# EAGLE board wheatstone_bridge_board (EAGLE 9.6.2)
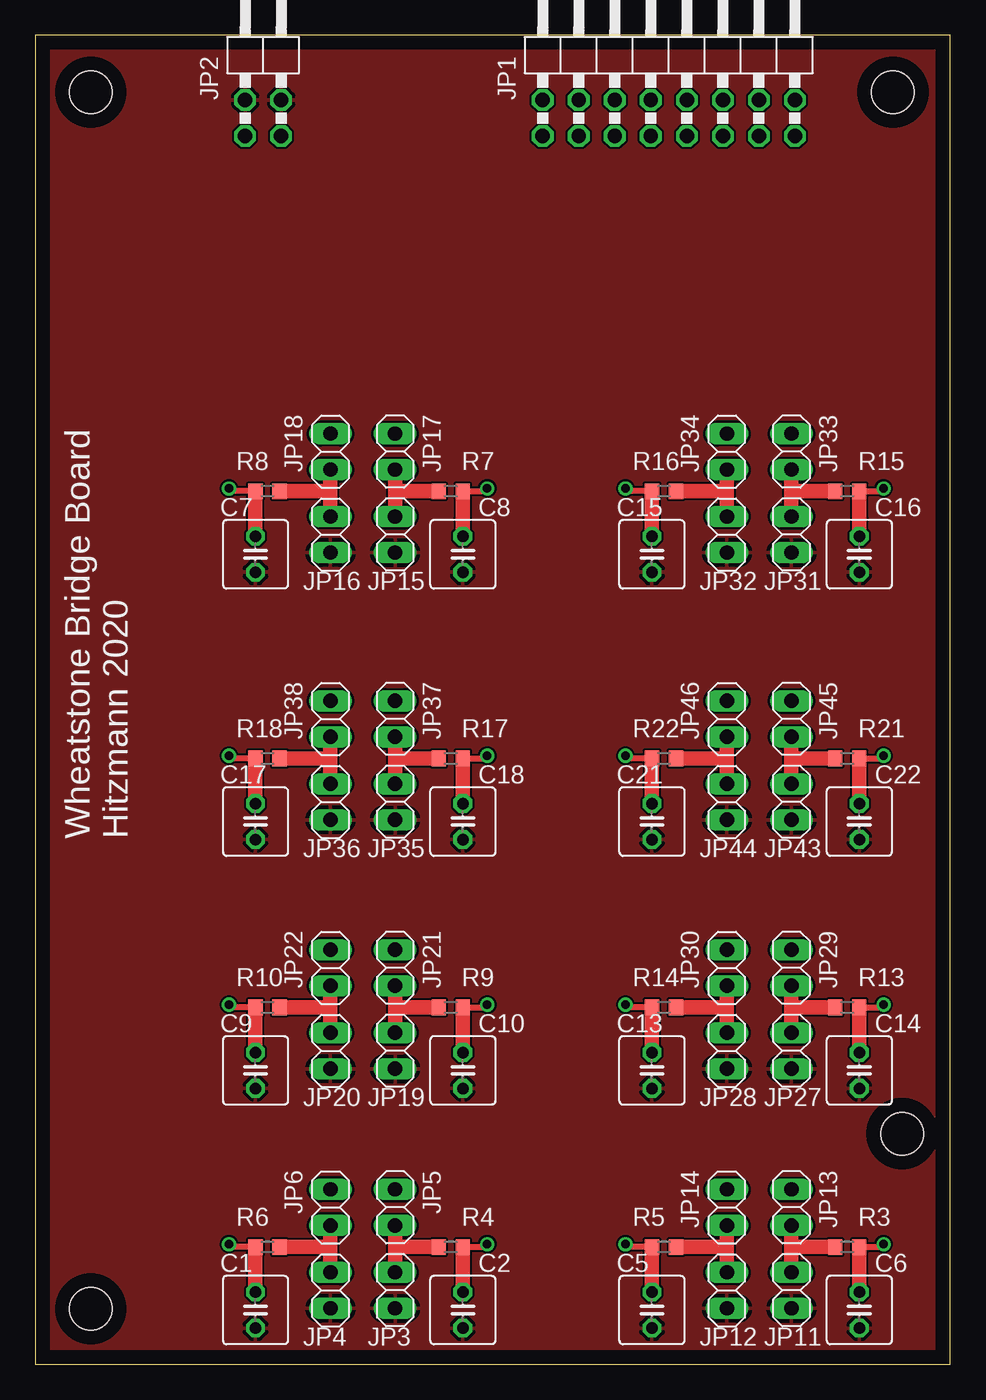
[diagram p0: board, top side]
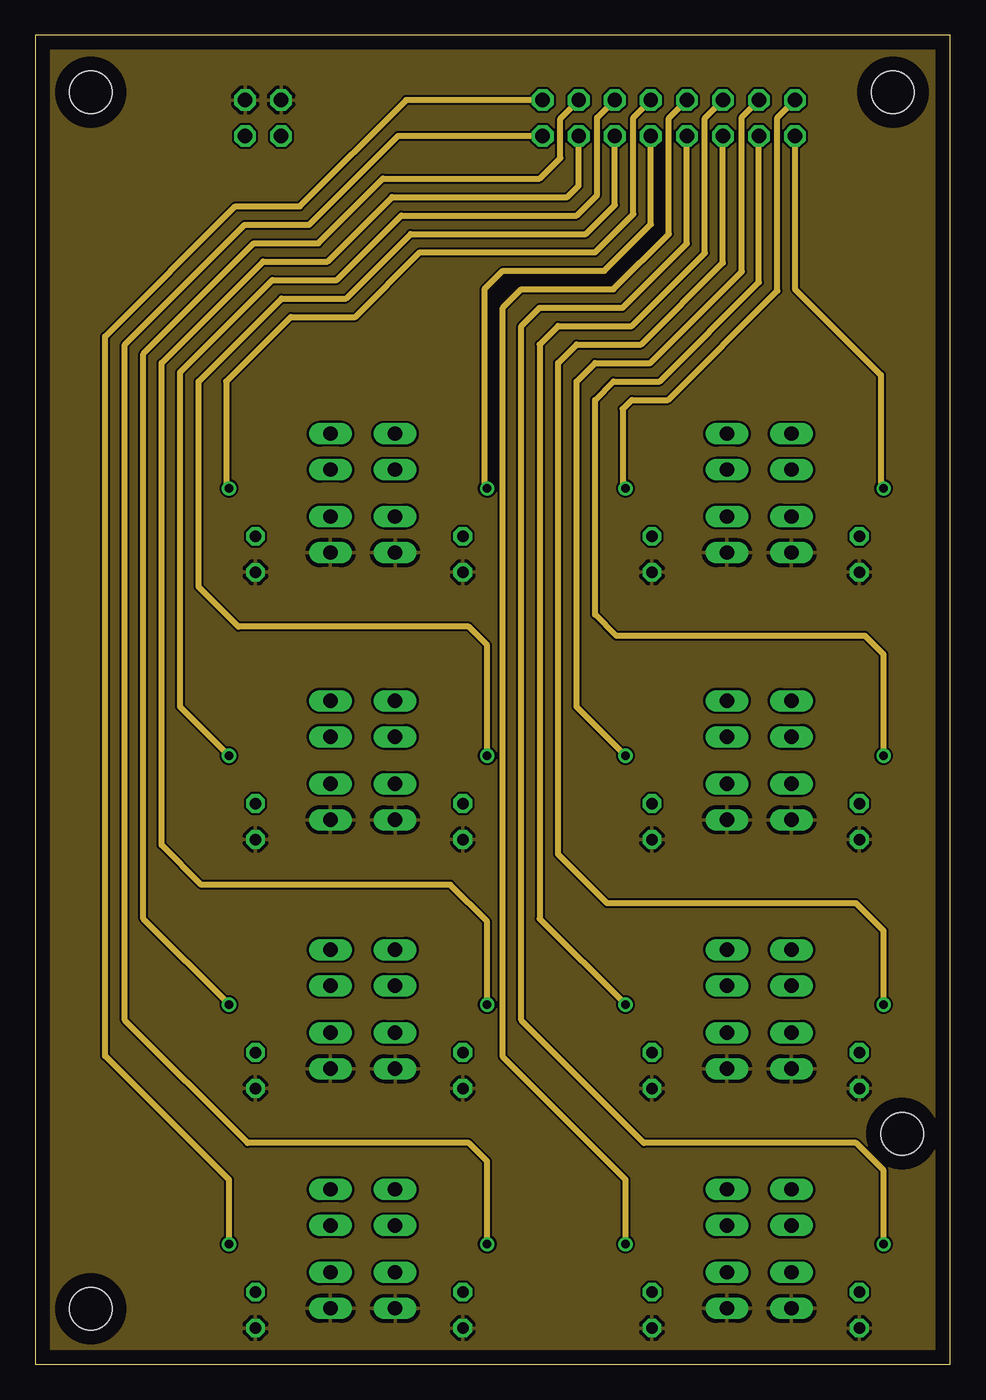
[diagram p1: board, inner layer Route2]
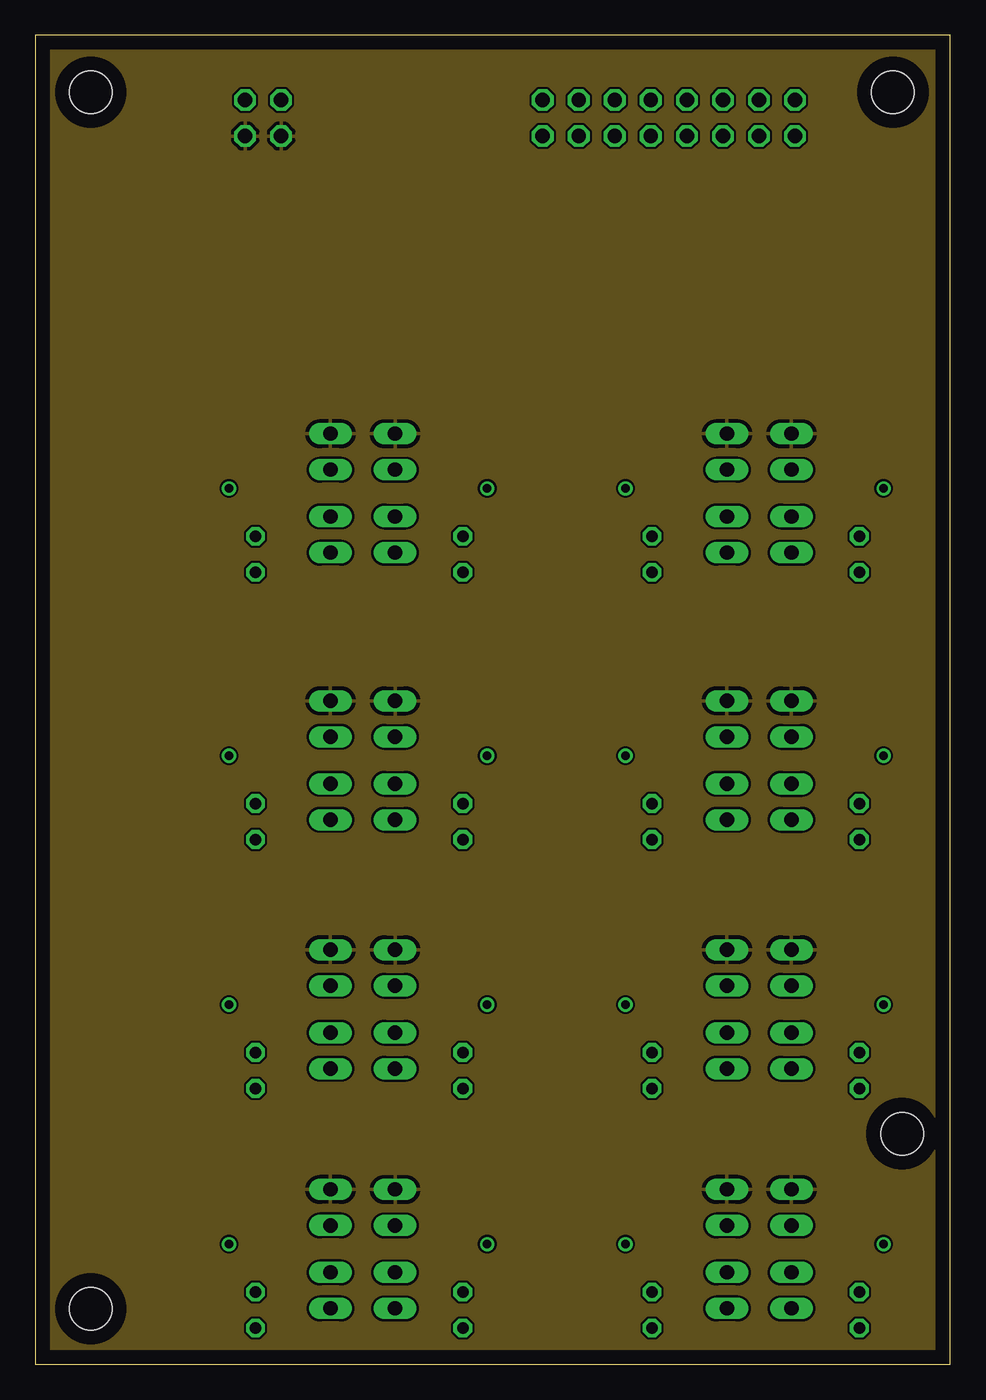
[diagram p2: board, inner layer Route15]
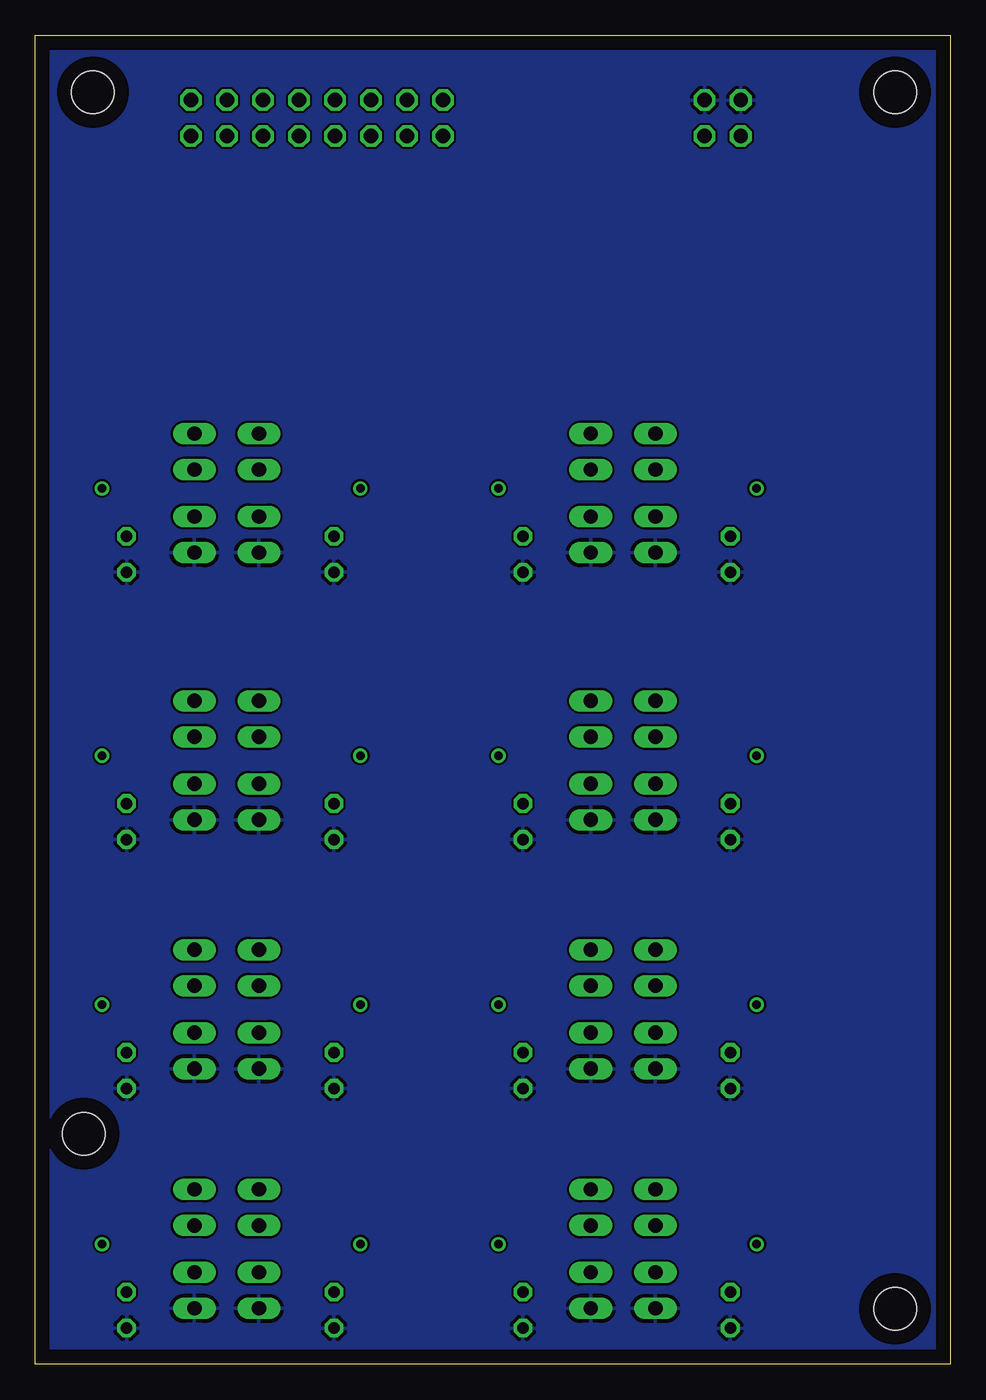
[diagram p3: board, bottom side, seen from below]

Size 64.5 x 93.7 mm. Coordinates in mm from the lower left corner, seen from the top.
Outline: 0,0 64.5,0 64.5,93.7 0,93.7 0,0
Copper layers (1+2*15+16): Top 0.035mm / dielectric 1.5mm / Route2 0.035mm / dielectric 0.15mm / Route15 0.035mm / dielectric 0.2mm / Bottom 0.035mm
Design rules "default *": minimum track width 6mil, minimum drill 0.35mm, track to track 6mil, track to pad 6mil, pad to pad 6mil, via to via 6mil, smd to smd 6mil, copper to edge 40mil, drill to drill 6mil, minimum pad ring 10mil, minimum via ring 8mil, stop-mask expansion 4mil, vias tented up to drill 0mil, thermal gap 10mil
Holes 3 mm at 3.9,89.7 60.45,89.7 61.1,16.25 3.9,3.9

## Footprints (pad centres in the part's own frame; a part is rotated, then mirrored left to right if it is on the bottom)
C025-050X050 = drill 0.813 octagon: 1 -1.27,0; 2 1.27,0
2X08/90 = drill 1.016 octagon: 1 -8.89,-6.35; 2 -8.89,-3.81; 3 -6.35,-6.35; 4 -6.35,-3.81; 5 -3.81,-6.35; 6 -3.81,-3.81; 7 -1.27,-6.35; 8 -1.27,-3.81; 9 1.27,-6.35; 10 1.27,-3.81; 11 3.81,-6.35; 12 3.81,-3.81; 13 6.35,-6.35; 14 6.35,-3.81; 15 8.89,-6.35; 16 8.89,-3.81
2X02/90 = drill 1.016 octagon: 1 -1.27,-6.35; 2 -1.27,-3.81; 3 1.27,-6.35; 4 1.27,-3.81
1X02 = drill 1.016 long: 1 -1.27,0; 2 1.27,0
R0603 = smd 1 x 1.1: 1 -0.85,0; 2 0.85,0

## Placement (x,y rotation side)
C1  [C025-050X050]  15.51,3.81 270 top
C2  [C025-050X050]  30.13,3.81 270 top
C5  [C025-050X050]  43.46,3.81 270 top
C6  [C025-050X050]  58.08,3.81 270 top
C7  [C025-050X050]  15.51,57.11 270 top
C8  [C025-050X050]  30.13,57.11 270 top
C9  [C025-050X050]  15.51,20.71 270 top
C10  [C025-050X050]  30.13,20.71 270 top
C13  [C025-050X050]  43.46,20.71 270 top
C14  [C025-050X050]  58.08,20.71 270 top
C15  [C025-050X050]  43.46,57.11 270 top
C16  [C025-050X050]  58.08,57.11 270 top
C17  [C025-050X050]  15.51,38.26 270 top
C18  [C025-050X050]  30.13,38.26 270 top
C21  [C025-050X050]  43.46,38.26 270 top
C22  [C025-050X050]  58.08,38.26 270 top
JP1  [2X08/90]  44.65,92.95 0 top
JP2  [2X02/90]  16.05,92.95 0 top
JP3  [1X02]  25.35,5.2 270 top
JP4  [1X02]  20.8,5.2 90 top
JP5  [1X02]  25.35,11.05 270 top
JP6  [1X02]  20.8,11.05 90 top
JP11  [1X02]  53.3,5.2 270 top
JP12  [1X02]  48.75,5.2 90 top
JP13  [1X02]  53.3,11.05 270 top
JP14  [1X02]  48.75,11.05 90 top
JP15  [1X02]  25.35,58.5 270 top
JP16  [1X02]  20.8,58.5 90 top
JP17  [1X02]  25.35,64.35 270 top
JP18  [1X02]  20.8,64.35 90 top
JP19  [1X02]  25.35,22.1 270 top
JP20  [1X02]  20.8,22.1 90 top
JP21  [1X02]  25.35,27.95 270 top
JP22  [1X02]  20.8,27.95 90 top
JP27  [1X02]  53.3,22.1 270 top
JP28  [1X02]  48.75,22.1 90 top
JP29  [1X02]  53.3,27.95 270 top
JP30  [1X02]  48.75,27.95 90 top
JP31  [1X02]  53.3,58.5 270 top
JP32  [1X02]  48.75,58.5 90 top
JP33  [1X02]  53.3,64.35 270 top
JP34  [1X02]  48.75,64.35 90 top
JP35  [1X02]  25.35,39.65 270 top
JP36  [1X02]  20.8,39.65 90 top
JP37  [1X02]  25.35,45.5 270 top
JP38  [1X02]  20.8,45.5 90 top
JP43  [1X02]  53.3,39.65 270 top
JP44  [1X02]  48.75,39.65 90 top
JP45  [1X02]  53.3,45.5 270 top
JP46  [1X02]  48.75,45.5 90 top
R3  [R0603]  57.23,8.26 0 top
R4  [R0603]  29.28,8.26 0 top
R5  [R0603]  44.31,8.26 180 top
R6  [R0603]  16.36,8.26 180 top
R7  [R0603]  29.28,61.55 0 top
R8  [R0603]  16.36,61.55 180 top
R9  [R0603]  29.28,25.16 0 top
R10  [R0603]  16.36,25.16 180 top
R13  [R0603]  57.23,25.16 0 top
R14  [R0603]  44.31,25.16 180 top
R15  [R0603]  57.23,61.55 0 top
R16  [R0603]  44.31,61.55 180 top
R17  [R0603]  29.28,42.7 0 top
R18  [R0603]  16.36,42.7 180 top
R21  [R0603]  57.23,42.7 0 top
R22  [R0603]  44.31,42.7 180 top

## Library data of the parts
C1 C2 C5-C10 C13-C18 C21 C22 R3-R10 R13-R18 R21 R22 = resistor
JP1-JP6 JP11-JP22 JP27-JP38 JP43-JP46 = pinhead

## Nets
GND: C1.2 C2.2 C5.2 C6.2 C7.2 C8.2 C9.2 C10.2 C13.2 C14.2 C15.2 C16.2 C17.2 C18.2 C21.2 C22.2 JP2.2 JP2.4 JP3.2 JP4.1 JP11.2 JP12.1 JP15.2 JP16.1 JP19.2 JP20.1 JP27.2 JP28.1 JP31.2 JP32.1 JP35.2 JP36.1 JP43.2 JP44.1
N$1: JP4.2 JP6.1 R6.1
N$2: JP3.1 JP5.2 R4.1
N$5: JP12.2 JP14.1 R5.1
N$6: JP11.1 JP13.2 R3.1
N$7: JP16.2 JP18.1 R8.1
N$8: JP15.1 JP17.2 R7.1
N$9: JP20.2 JP22.1 R10.1
N$10: JP19.1 JP21.2 R9.1
N$13: JP28.2 JP30.1 R14.1
N$14: JP27.1 JP29.2 R13.1
N$15: JP32.2 JP34.1 R16.1
N$16: JP31.1 JP33.2 R15.1
N$17: JP36.2 JP38.1 R18.1
N$18: JP35.1 JP37.2 R17.1
N$21: JP44.2 JP46.1 R22.1
N$22: JP43.1 JP45.2 R21.1
S_1_+: C2.1 JP1.1 R4.2
S_1_-: C1.1 JP1.2 R6.2
S_2_+: C6.1 JP1.9 R3.2
S_2_-: C5.1 JP1.10 R5.2
S_3_+: C10.1 JP1.3 R9.2
S_3_-: C9.1 JP1.4 R10.2
S_4_+: C14.1 JP1.11 R13.2
S_4_-: C13.1 JP1.12 R14.2
S_5_+: C18.1 JP1.5 R17.2
S_5_-: C17.1 JP1.6 R18.2
S_6_+: C22.1 JP1.13 R21.2
S_6_-: C21.1 JP1.14 R22.2
S_7_+: C8.1 JP1.7 R7.2
S_7_-: C7.1 JP1.8 R8.2
S_8_+: C16.1 JP1.15 R15.2
S_8_-: C15.1 JP1.16 R16.2
VCC: JP2.1 JP2.3 JP5.1 JP6.2 JP13.1 JP14.2 JP17.1 JP18.2 JP21.1 JP22.2 JP29.1 JP30.2 JP33.1 JP34.2 JP37.1 JP38.2 JP45.1 JP46.2

## Tracks (layer width: path | path; a pad name or v marks a point on that pad's centre or on a via)
GND
  pour Top: -1.5,-1.3 65.94,-1.3 65.94,94.73 -1.5,94.73
  pour Bottom: -2.15,-1.95 66.75,-1.95 66.75,95.3 -2.15,95.3
  pour Route2: -0.85,-0.65 64.8,-0.65 64.8,94 -0.85,94
N$1
  Top 1.016: JP6.1 20.8,8.45 | 20.8,8.45 JP4.2 | 20.8,8.45 20.61,8.26 R6.1
N$2
  Top 1.016: JP3.1 25.35,8.25 | 25.35,8.25 JP5.2 | R4.1 25.36,8.26 25.35,8.25
N$5
  Top 1.016: JP14.1 48.75,8.45 | 48.75,8.45 JP12.2 | 48.75,8.45 48.55,8.26 R5.1
N$6
  Top 1.016: JP11.1 53.3,8.45 | 53.3,8.45 JP13.2 | 53.3,8.45 53.49,8.26 R3.1
N$7
  Top 1.016: JP18.1 20.8,61.75 | 20.8,61.75 JP16.2 | 20.8,61.75 20.61,61.55 R8.1
N$8
  Top 1.016: JP15.1 25.35,61.75 | 25.35,61.75 JP17.2 | 25.35,61.75 25.55,61.55 R7.1
N$9
  Top 1.016: JP22.1 20.8,25.35 | 20.8,25.35 JP20.2 | 20.8,25.35 20.61,25.16 R10.1
N$10
  Top 1.016: JP19.1 25.35,25.35 | 25.35,25.35 JP21.2 | 25.35,25.35 25.55,25.16 R9.1
N$13
  Top 1.016: JP28.2 48.75,25.35 | 48.75,25.35 JP30.1 | 48.75,25.35 48.55,25.16 R14.1
N$14
  Top 1.016: JP27.1 53.3,25.35 | 53.3,25.35 JP29.2 | 53.3,25.35 53.49,25.16 R13.1
N$15
  Top 1.016: JP34.1 48.75,61.75 | 48.75,61.75 JP32.2 | 48.75,61.75 48.55,61.55 R16.1
N$16
  Top 1.016: JP31.1 53.3,61.75 | 53.3,61.75 JP33.2 | 53.3,61.75 53.49,61.55 R15.1
N$17
  Top 1.016: JP38.1 20.8,42.9 | 20.8,42.9 JP36.2 | 20.8,42.9 20.61,42.7 R18.1
N$18
  Top 1.016: JP35.1 25.35,42.9 | 25.35,42.9 JP37.2 | 25.35,42.9 25.55,42.7 R17.1
N$21
  Top 1.016: JP46.1 48.75,42.9 | 48.75,42.9 JP44.2 | 48.75,42.9 48.55,42.7 R22.1
N$22
  Top 1.016: JP43.1 53.3,42.9 | 53.3,42.9 JP45.2 | 53.3,42.9 53.49,42.7 R21.1
S_1_+  (via drill 0.6)
  Top 0.406: R4.2 31.66,8.26 v31.85,8.45
  Top 1.016: R4.2 C2.1
  Route2 0.406: v31.85,8.45 31.85,14.3 30.55,15.6 14.95,15.6 6.3,24.25 6.3,71.9 14.75,80.35 19.3,80.35 25.55,86.6 JP1.1
S_1_-  (via drill 0.6)
  Top 0.406: R6.2 13.85,8.26 v13.65,8.45
  Top 1.016: C1.1 R6.2
  Route2 0.406: v13.65,8.45 13.65,13 4.92,21.73 4.92,72.47 14.1,81.65 18.65,81.65 26.14,89.14 JP1.2
S_2_+  (via drill 0.6)
  Top 0.406: R3.2 59.6,8.26 v59.8,8.45
  Top 1.016: C6.1 R3.2
  Route2 0.406: v59.8,8.45 59.8,13.65 57.85,15.6 42.9,15.6 34.25,24.25 34.25,73.2 35.55,74.5 41.4,74.5 45.92,79.02 JP1.9
S_2_-  (via drill 0.6)
  Top 0.406: R5.2 41.8,8.26 v41.6,8.45
  Top 1.016: C5.1 R5.2
  Route2 0.406: v41.6,8.45 41.6,13 32.95,21.65 32.95,74.5 34.25,75.8 40.75,75.8 44.65,79.7 44.65,87.87 JP1.10
S_3_+  (via drill 0.6)
  Top 0.406: R9.2 31.66,25.16 v31.85,25.35
  Top 1.016: C10.1 R9.2
  Route2 0.406: v31.85,25.35 31.85,31.2 29.25,33.8 11.7,33.8 8.9,36.6 8.9,70.6 16.05,77.75 20.6,77.75 25.15,82.3 37.5,82.3 38.3,83.1 JP1.3
S_3_-  (via drill 0.6)
  Top 0.406: R10.2 13.85,25.16 v13.65,25.35
  Top 1.016: C9.1 R10.2
  Route2 0.406: v13.65,25.35 7.6,31.4 7.6,71.25 15.4,79.05 19.95,79.05 24.5,83.6 35.55,83.6 37,85.05 37,87.84 JP1.4
S_4_+  (via drill 0.6)
  Top 0.406: R13.2 59.6,25.16 v59.8,25.35
  Top 1.016: C14.1 R13.2
  Route2 0.406: v59.8,25.35 59.8,30.55 57.85,32.5 40.3,32.5 36.85,35.95 36.85,70.6 38.15,71.9 42.7,71.9 48.46,77.66 JP1.11
S_4_-  (via drill 0.6)
  Top 0.406: R14.2 41.8,25.16 v41.6,25.35
  Top 1.016: C13.1 R14.2
  Route2 0.406: JP1.12 47.2,87.88 47.2,78.35 42.05,73.2 36.85,73.2 35.55,71.9 35.55,31.4 v41.6,25.35
S_5_+  (via drill 0.6)
  Top 0.406: R17.2 31.66,42.7 v31.85,42.9
  Top 1.016: C18.1 R17.2
  Route2 0.406: v31.85,42.9 31.85,50.7 30.55,52 14.3,52 11.5,54.8 11.5,69.3 17.35,75.15 21.9,75.15 26.45,79.7 38.8,79.7 40.84,81.74 JP1.5
S_5_-  (via drill 0.6)
  Top 0.406: R18.2 13.85,42.7 v13.65,42.9
  Top 1.016: C17.1 R18.2
  Route2 0.406: v13.65,42.9 10.2,46.35 10.2,69.95 16.7,76.45 21.25,76.45 25.8,81 38.15,81 39.6,82.45 39.6,87.9 JP1.6
S_6_+  (via drill 0.6)
  Top 0.406: R21.2 59.6,42.7 v59.8,42.9
  Top 1.016: C22.1 R21.2
  Route2 0.406: v59.8,42.9 59.8,50.05 58.5,51.35 40.95,51.35 39.45,52.85 39.45,68 40.75,69.3 44,69.3 51,76.3 JP1.13
S_6_-  (via drill 0.6)
  Top 0.406: R22.2 41.8,42.7 v41.6,42.9
  Top 1.016: C21.1 R22.2
  Route2 0.406: v41.6,42.9 38.15,46.35 38.15,69.3 39.45,70.6 43.35,70.6 49.8,77.05 49.8,87.94 JP1.14
S_7_+  (via drill 0.6)
  Top 0.406: R7.2 31.66,61.55 v31.85,61.75
  Top 1.016: C8.1 R7.2
  Route2 0.406: JP1.7 43.38,80.38 40.1,77.1 32.95,77.1 31.65,75.8 31.65,61.95 v31.85,61.75
S_7_-  (via drill 0.6)
  Top 0.406: R8.2 13.85,61.55 v13.65,61.75
  Top 1.016: C7.1 R8.2
  Route2 0.406: v13.65,61.75 13.45,61.95 13.45,69.3 18,73.85 22.55,73.85 27.1,78.4 39.45,78.4 42.15,81.1 42.15,87.91 JP1.8
S_8_+  (via drill 0.6)
  Top 0.406: R15.2 59.6,61.55 v59.8,61.75
  Top 1.016: C16.1 R15.2
  Route2 0.406: JP1.15 53.54,75.81 59.6,69.75 59.6,61.95 v59.8,61.75
S_8_-  (via drill 0.6)
  Top 0.406: R16.2 41.8,61.55 v41.6,61.75
  Top 1.016: C15.1 R16.2
  Route2 0.406: v41.6,61.75 41.4,61.95 41.4,67.35 42.05,68 44.6,68 52.3,75.7 52.3,87.9 JP1.16
VCC
  pour Route15: -2.8,-2.6 67.4,-2.6 67.4,95.95 -2.8,95.95

## Text on the board
tNames: Wheatstone Bridge Board / Hitzmann 2020